# Altium PCB Version1.PcbDoc (part 2 of 2)
Units mm, origin at the board's own origin, x right, y up, seen from the top; angles counter-clockwise.
Board outline 82.53 x 37.85 mm, 2 copper layers (Top Layer, Bottom Layer); 105 components, 60 nets, 265 pads, 342 vias.
Unrouted connection lines stored in the file: 1.
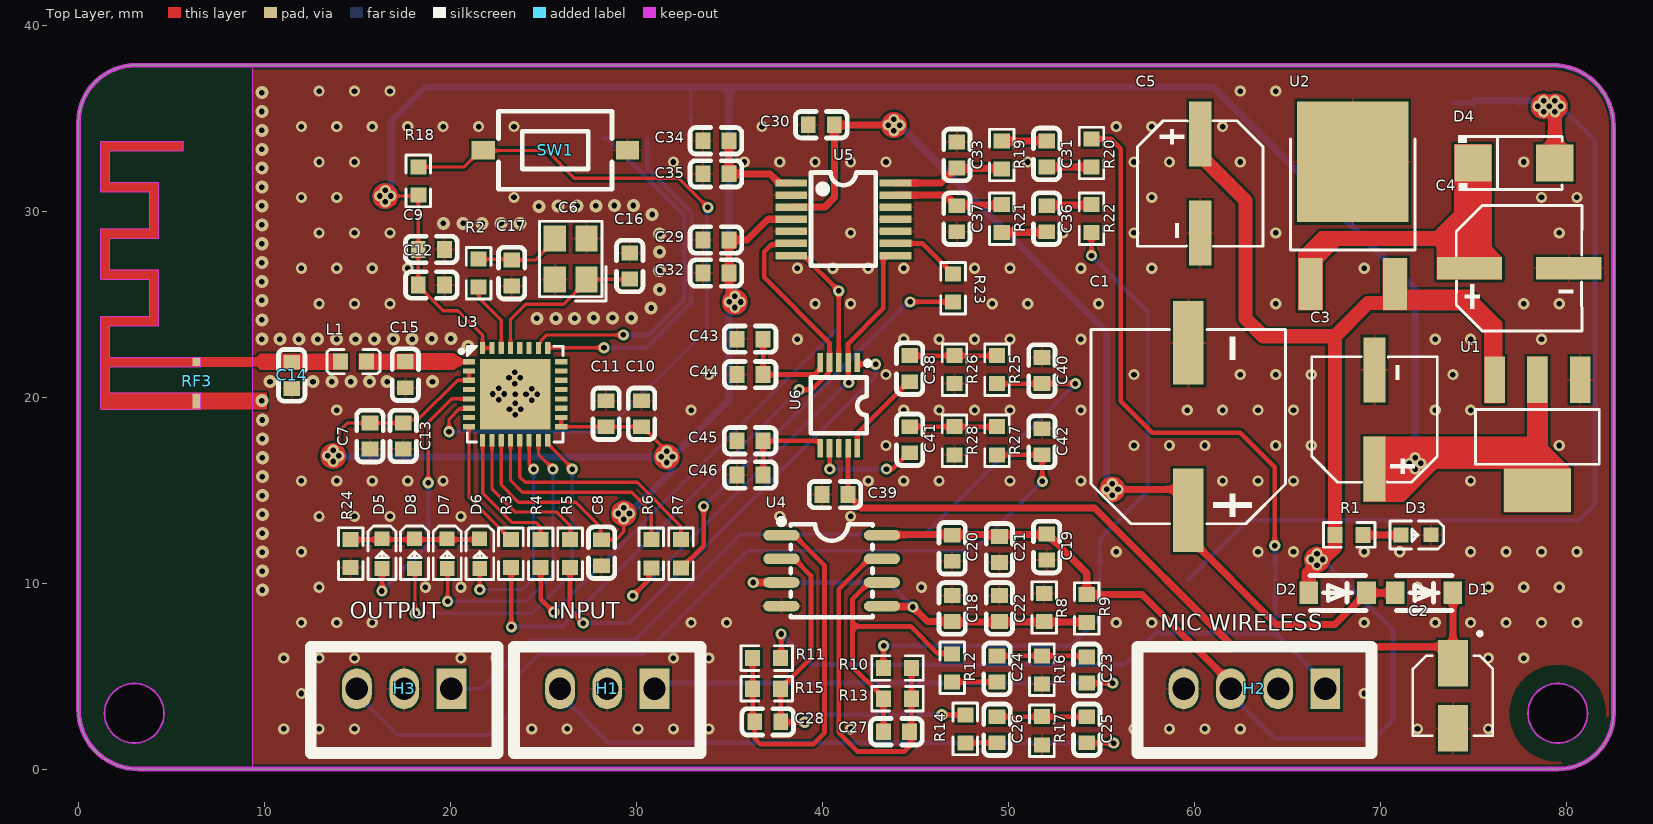
[diagram p0: Top Layer view]

## Other copper (continued)
Bottom Layer: (continued)
  region net +4.3: 56.27,15.062 56.27,15.037 cw(c55.585,15.037) 55.585,14.351 cw(c55.585,15.037) 54.899,15.037 54.899,15.062 cw(c55.559,15.062) 55.559,15.723 55.61,15.723 cw(c55.61,15.062)
  region net +5V: 65.905,11.243 65.905,11.269 cw(c66.591,11.269) 66.591,11.954 cw(c66.591,11.269) 67.276,11.269 67.276,11.243 cw(c66.616,11.243) 66.616,10.583 66.565,10.583 cw(c66.565,11.243)
  region net +3.3V: 71.841,17.12 71.866,17.12 cw(c71.866,16.434) 72.552,16.434 cw(c71.866,16.434) 71.866,15.748 71.841,15.748 cw(c71.841,16.408) 71.18,16.408 71.18,16.459 cw(c71.841,16.459)
  region net +8VDC: 79.41,34.95 79.384,34.95 cw(c79.384,35.636) 78.699,35.636 cw(c79.384,35.636) 79.384,36.322 79.41,36.322 cw(c79.41,35.662) 80.07,35.662 80.07,35.611 cw(c79.41,35.611)
  pour cut-out: 76.934,3 ccw(c79.534,3) 79.534,0.4 ccw(c79.534,3) 82.134,3 ccw(c79.534,3) 79.534,5.6 ccw(c79.534,3)

## Silkscreen, mask and mechanical layers (free items; w line width, h text height)
Top Overlay:
  text "OUTPUT" at 14.589,7.798 h1.52
  text "INPUT" at 25.511,7.798 h1.52
  text "MIC WIRELESS" at 58.15,7.137 h1.52
Bottom Overlay:
  text "8->15VDC" at 71.968,34.912 h2.54
  text "GND" at 71.968,28.334 h2.54
  text "MIC WIRELESS" at 64.779,11.786 h1.52
Top Solder:
  region: 9.329,22.147 9.329,21.641 1.69,21.641 1.687,21.643 1.687,20.243 9.331,20.243 9.331,19.343 1.188,19.343 1.187,19.343 1.187,24.343 3.827,24.343 3.827,26.343 1.187,26.343 1.187,29.043 3.827,29.043 3.827,31.043 1.187,31.043 1.187,33.743 5.627,33.743 5.627,33.243 1.687,33.243 1.687,31.543 4.327,31.543 4.327,28.543 1.687,28.543 1.687,26.843 4.327,26.843 4.327,23.843 1.687,23.843 1.687,22.143 9.326,22.143